# Altium PCB differential receiver.PcbDoc
Units mil, origin at the board's own origin, x right, y up, seen from the top; angles counter-clockwise.
Board outline 2283.46 x 1889.76 mil, 4 copper layers (Top Layer, Layer 1, Layer 2, Bottom Layer), stack 62.417 mil thick; 38 components, 25 nets, 120 pads, 76 vias.
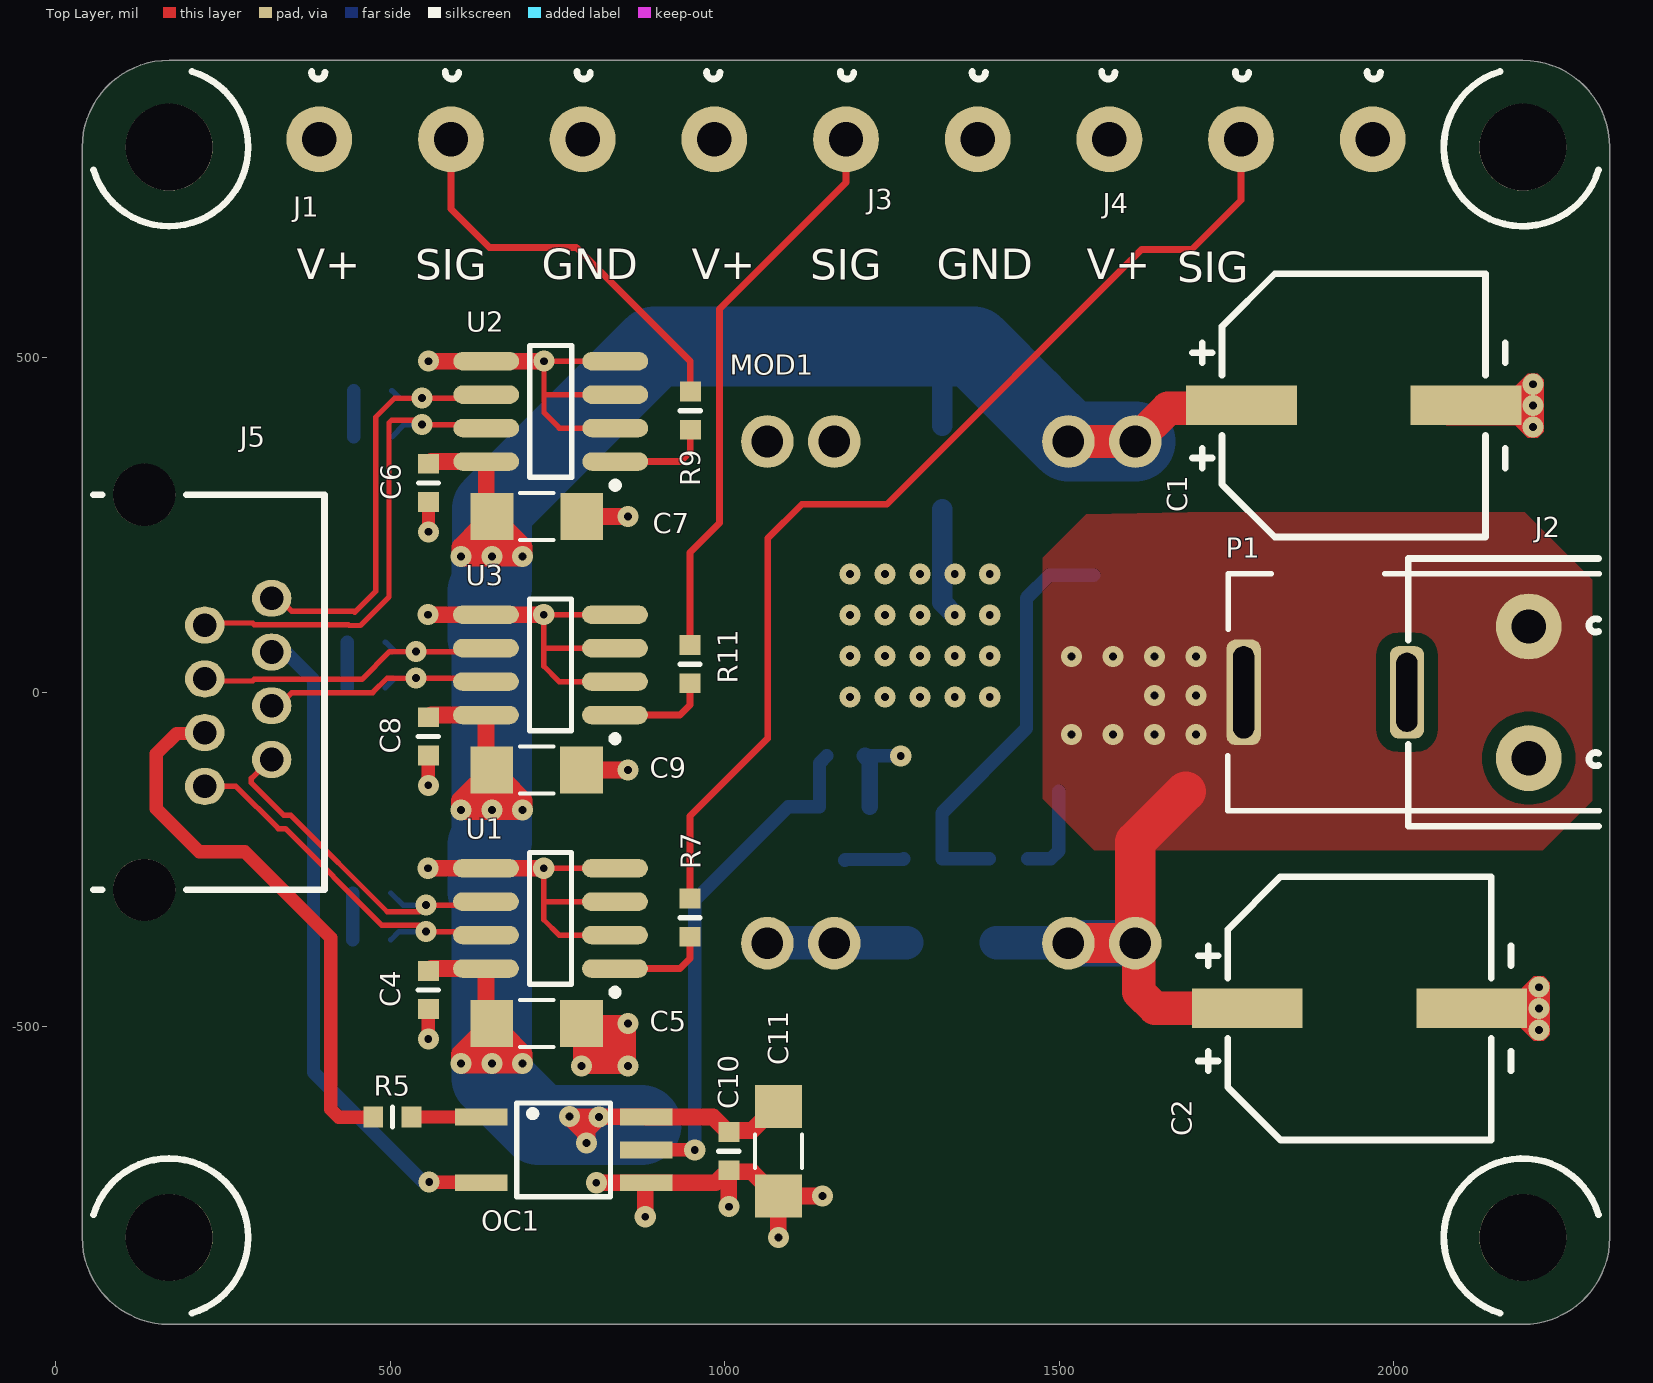
[diagram p0: Top Layer view]
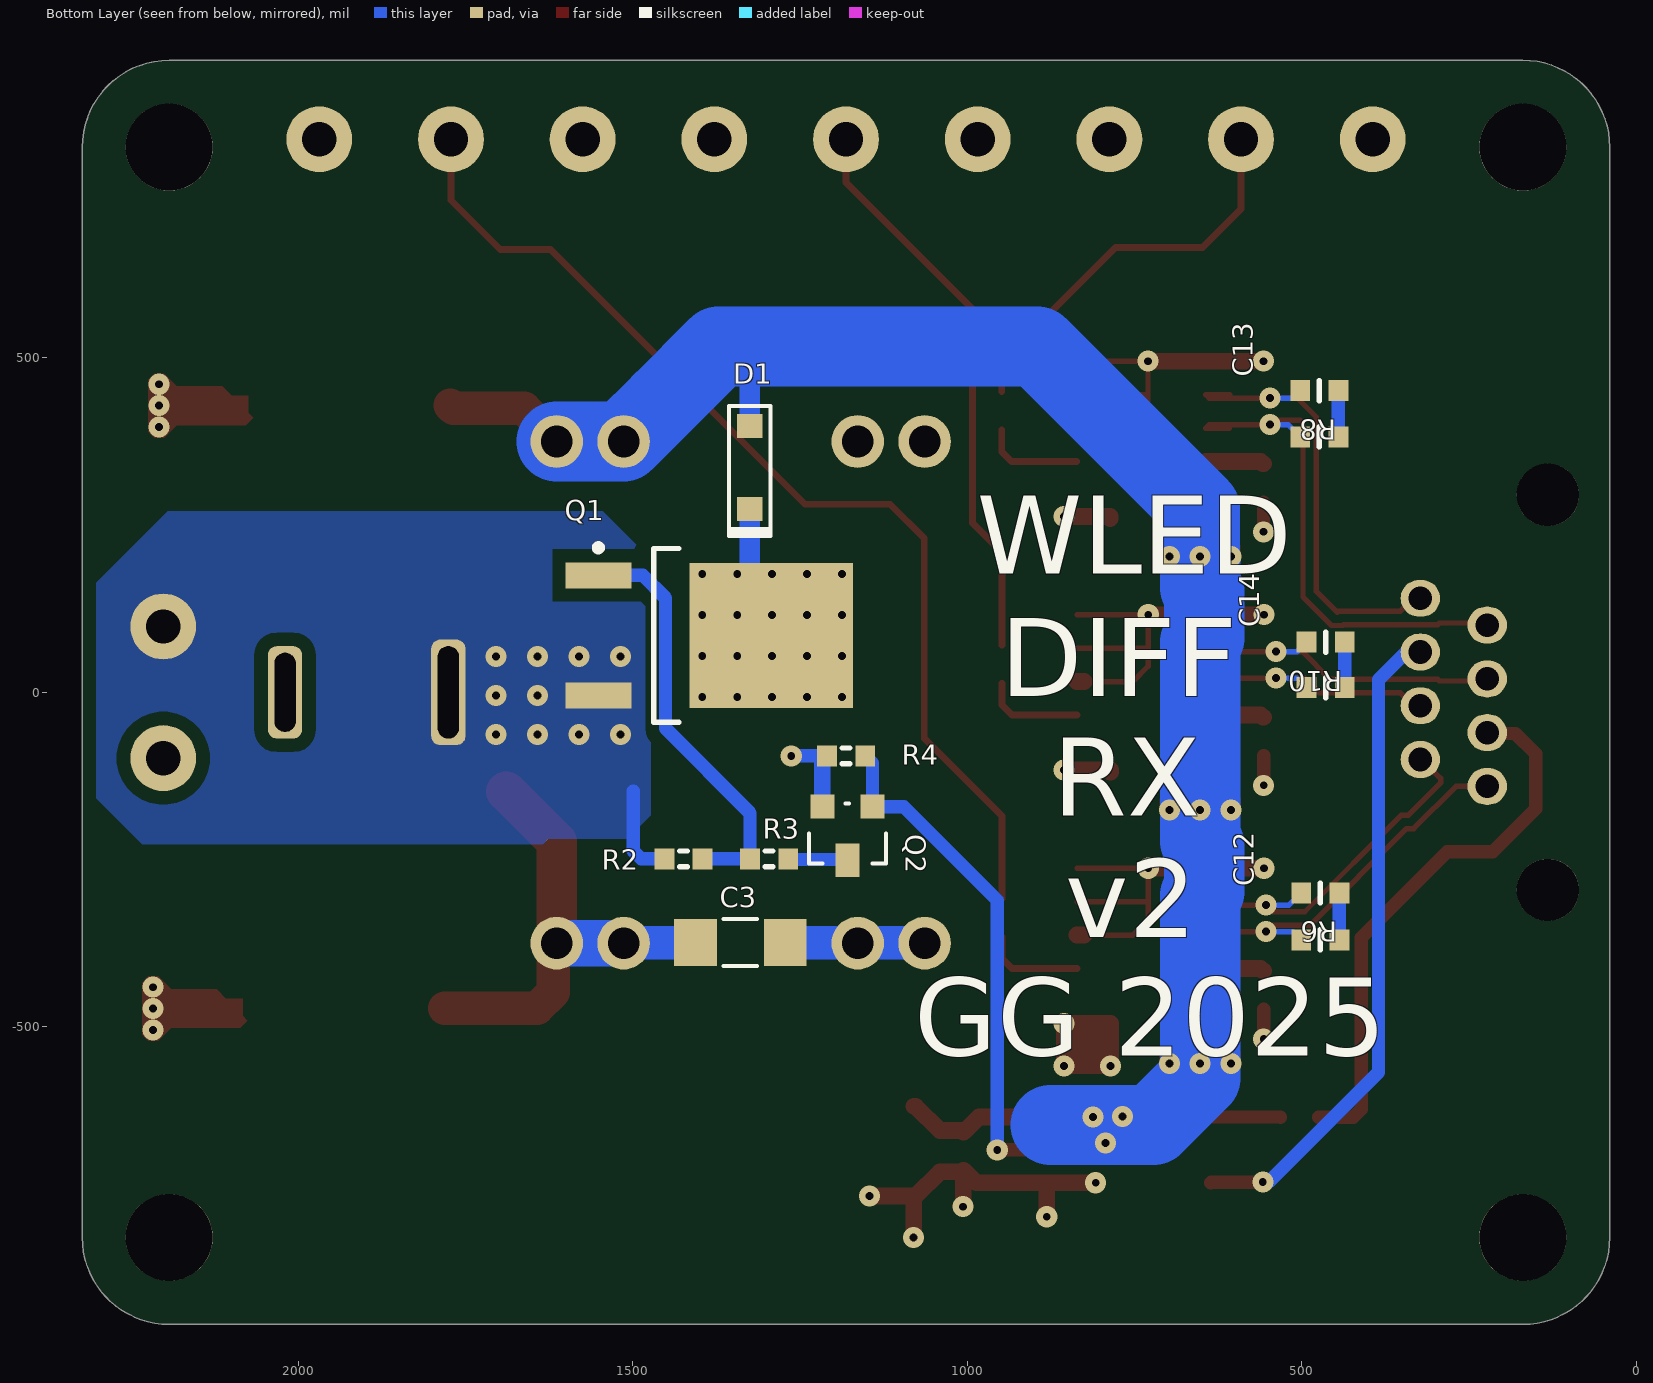
[diagram p1: Bottom Layer view, seen from below]
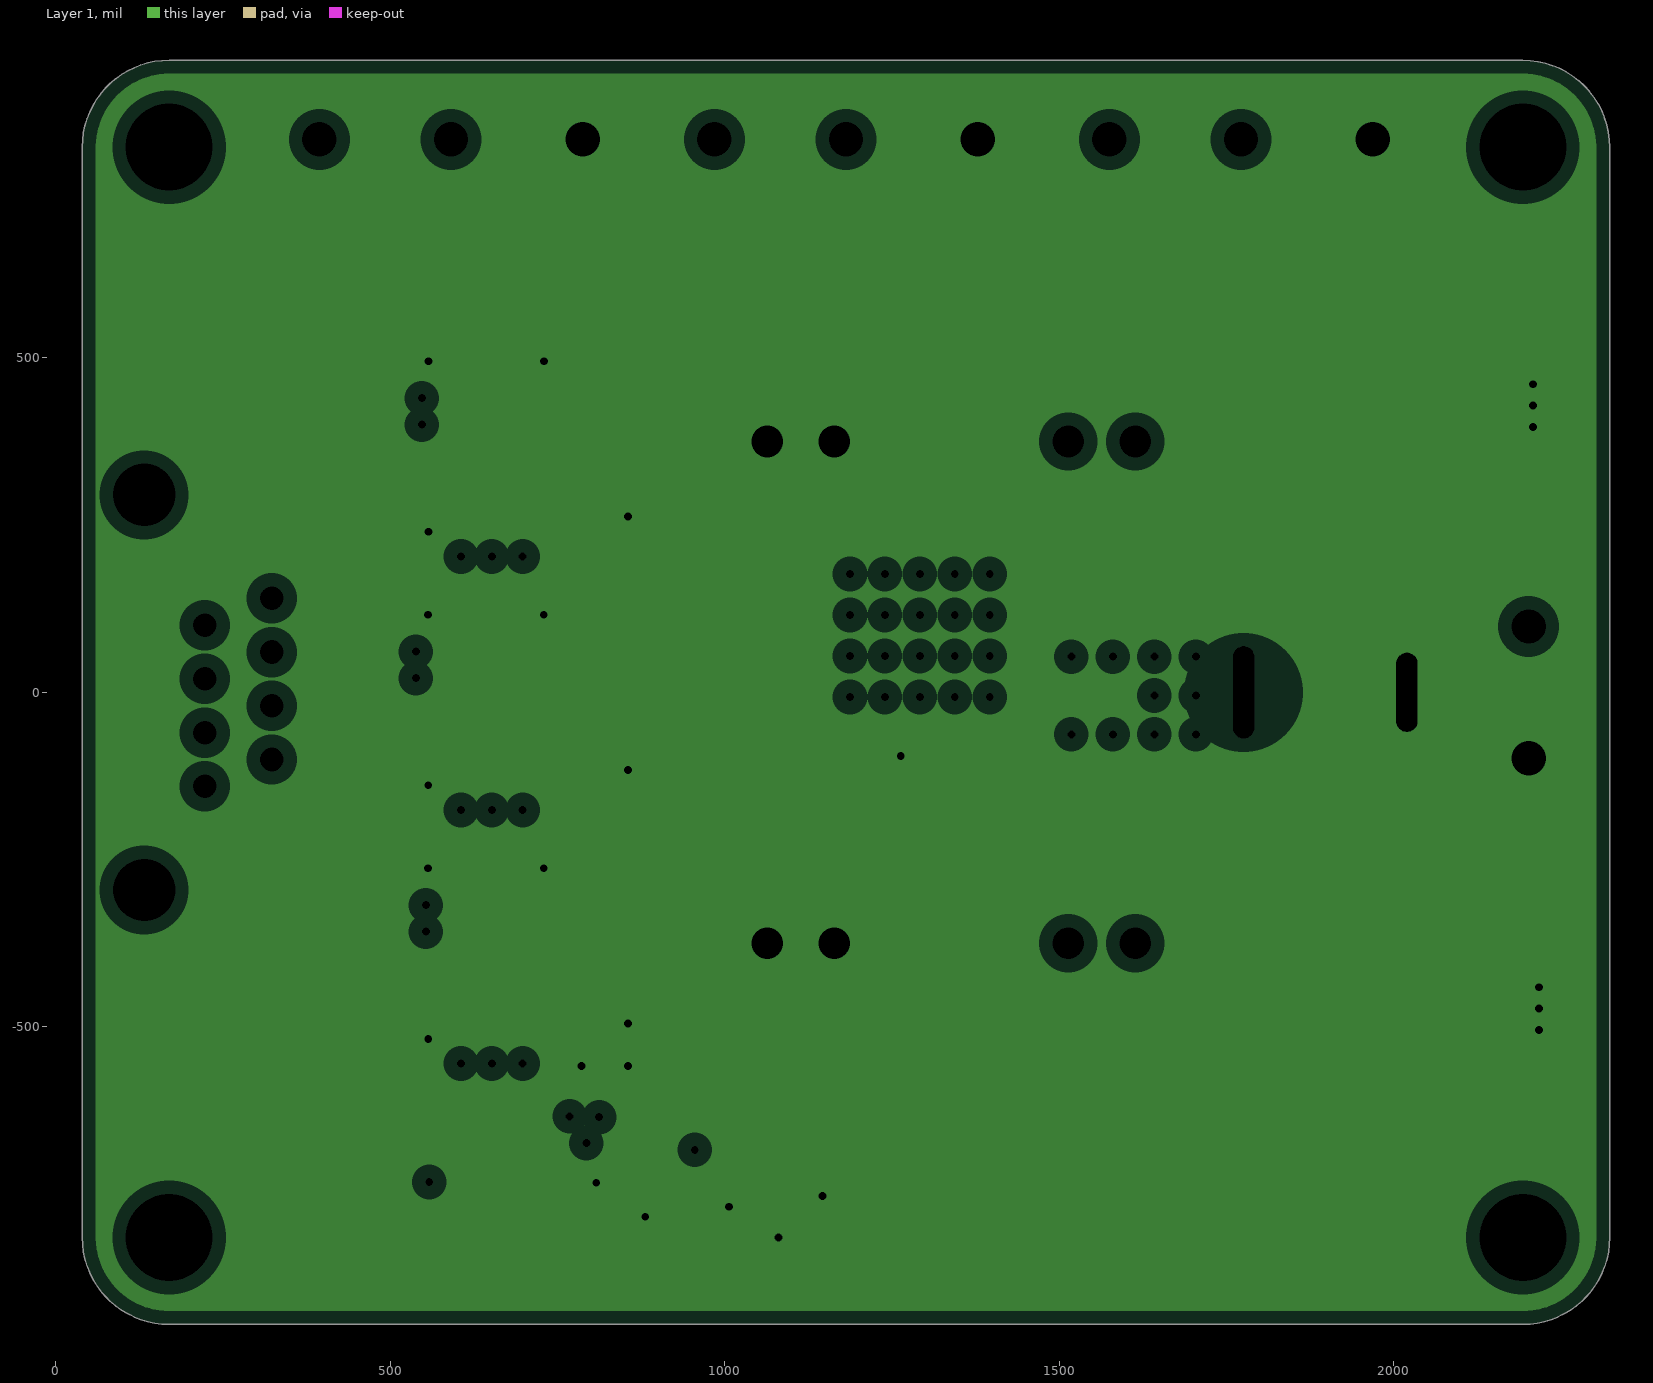
[diagram p2: Layer 1, clearances drawn from the general rule]
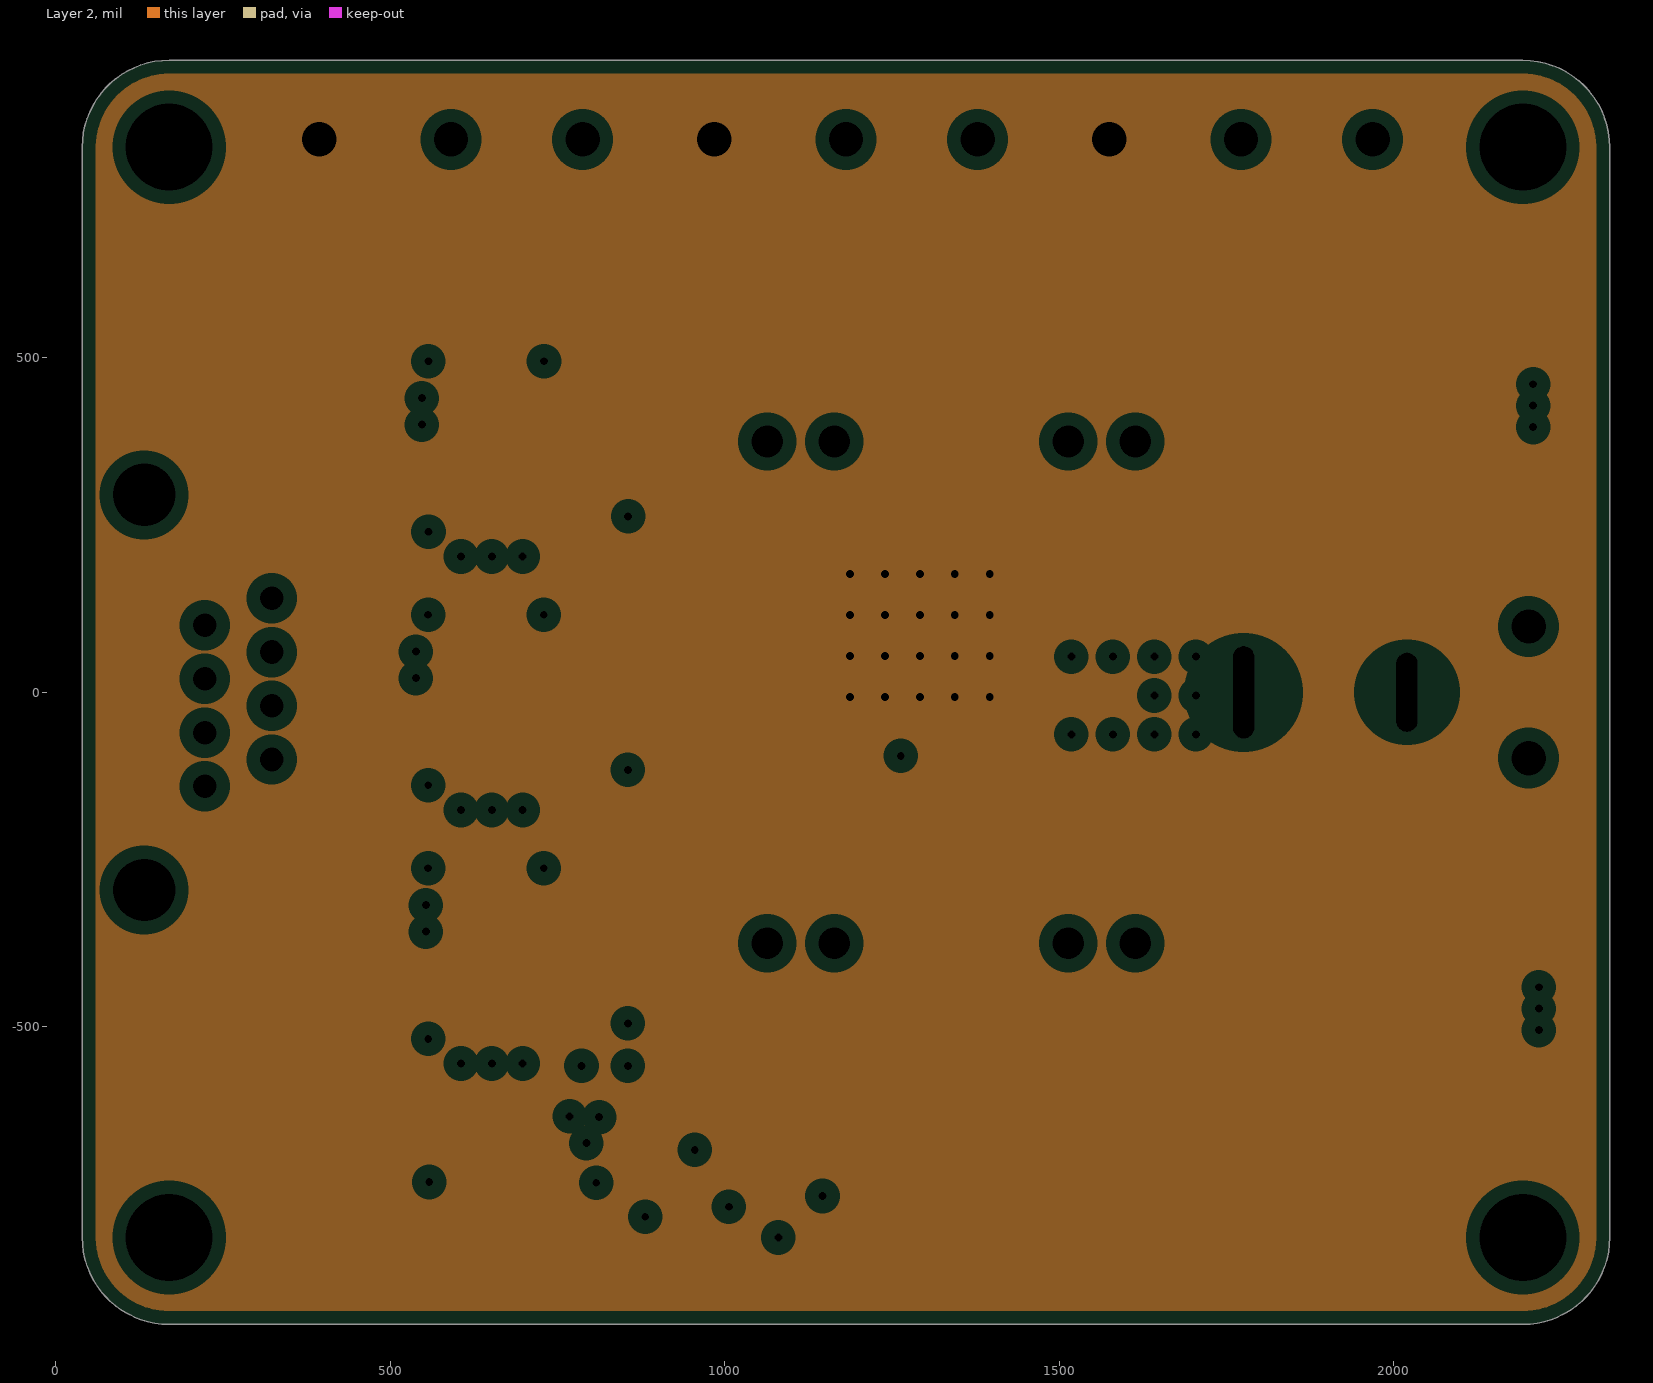
[diagram p3: Layer 2, clearances drawn from the general rule]
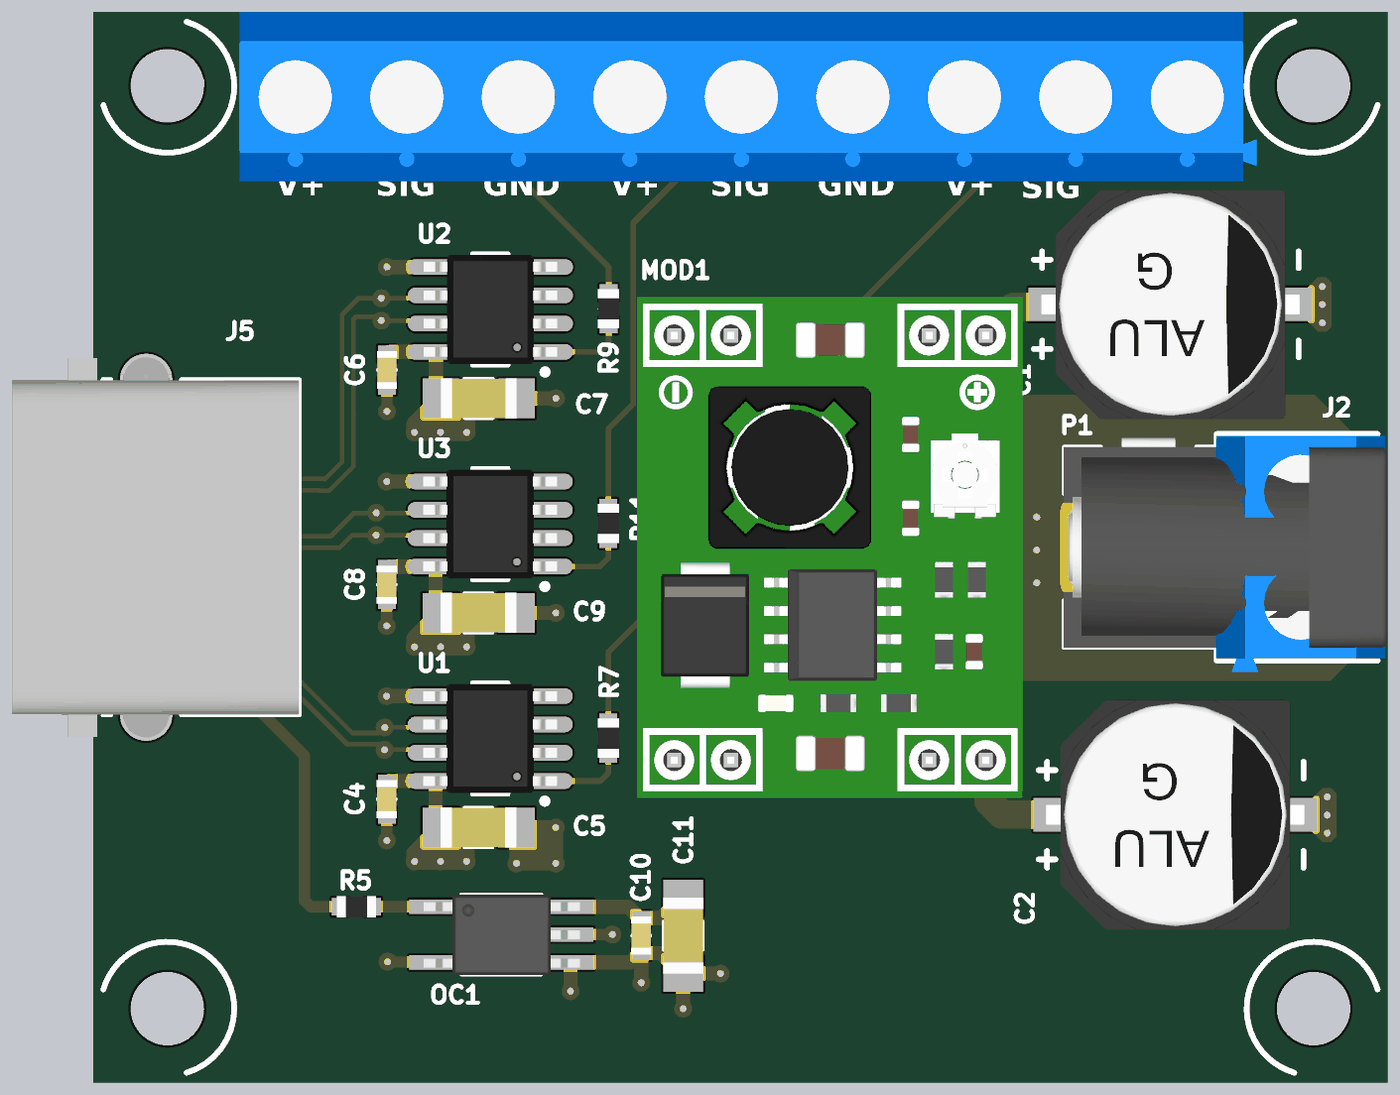
[diagram p4: 3D render of the assembled board from above, using the file's embedded part models]
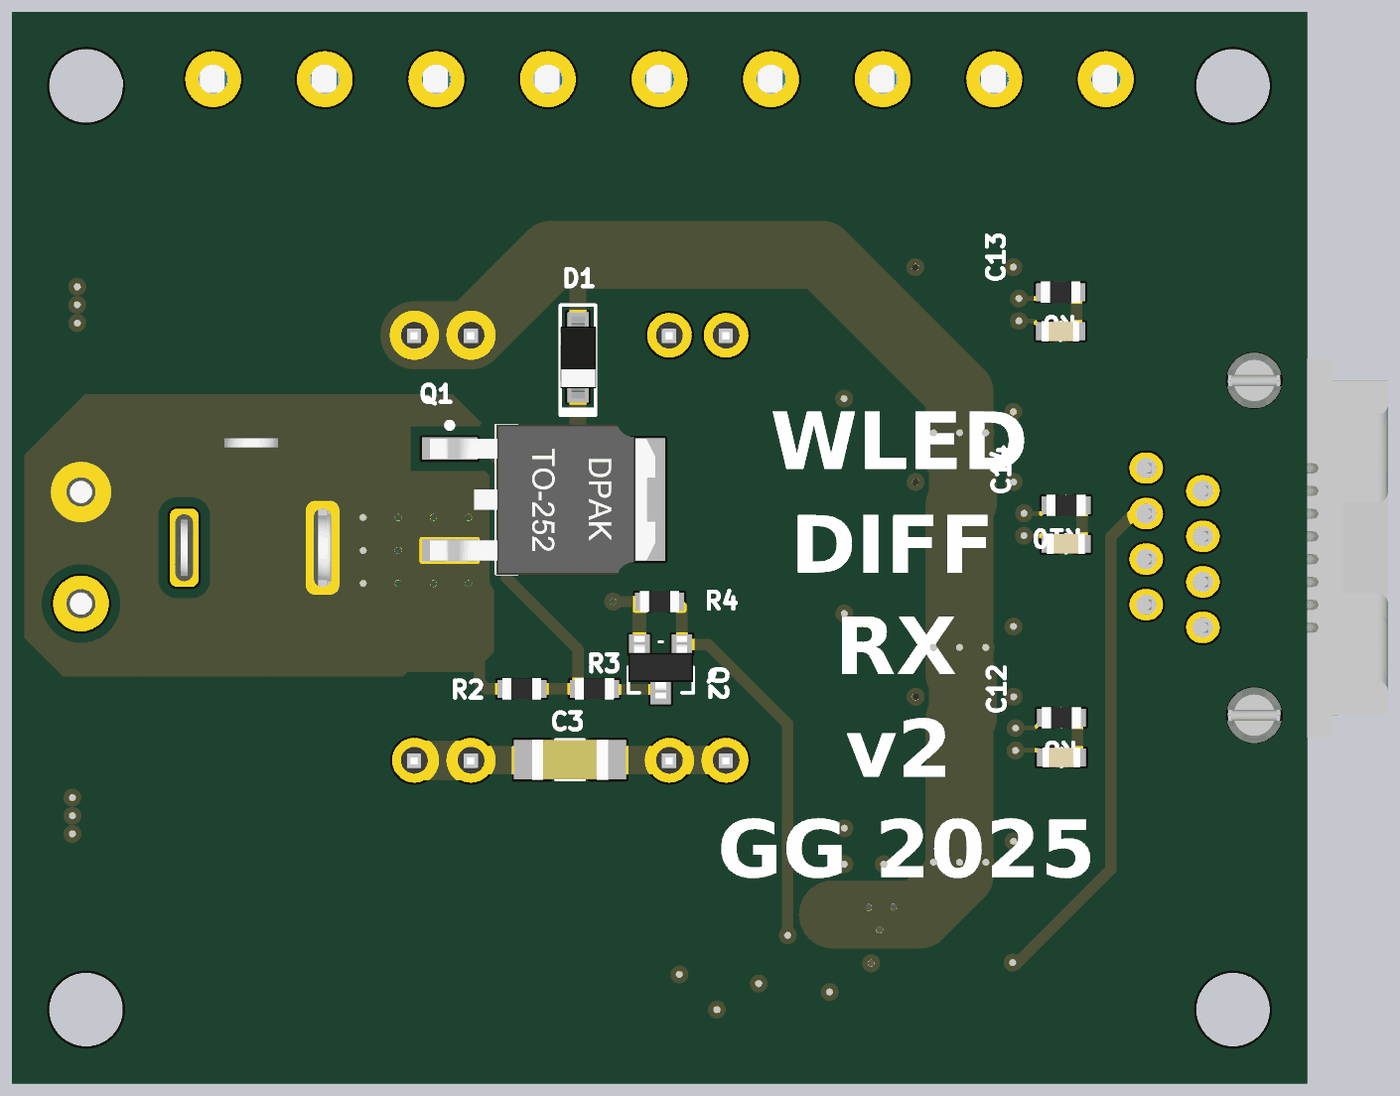
[diagram p5: 3D render of the assembled board from below, using the file's embedded part models]

## Layer stack, top to bottom
Top Solder: solder mask 0.4, Solder Resist, Dk 3.5
Top Layer: signal copper 1.378
Dielectric 2: prepreg 8.2677, PP-006, Dk 4.1
Layer 1: plane copper 0.5984, net GND
Dielectric 1: dielectric 41.9291, FR-4, Dk 4.8
Layer 2: plane copper 0.5984, net VLED
Dielectric 3: prepreg 8.2677, PP-006, Dk 4.1
Bottom Layer: signal copper 1.378
Bottom Solder: solder mask 0.4, Solder Resist, Dk 3.5

## Board outline
39.37,-814.96 39.37,814.96 cw(c169.29,814.96) 169.29,944.88 2192.91,944.88 cw(c2192.91,814.96) 2322.83,814.96 2322.83,-814.96 cw(c2192.91,-814.96) 2192.91,-944.88 169.29,-944.88 cw(c169.29,-814.96)

## Design rules (kind name [scope] priority, off if disabled: settings)
BoardOutlineClearance [All] p1: gap=11.81 ignorepadtopadclearanceinfootprint=FALSE
Clearance Clearance_polygon [InPolygon] p1: gap=20 ignorepadtopadclearanceinfootprint=FALSE
Clearance [All] p2: gap=8 ignorepadtopadclearanceinfootprint=TRUE
ComponentClearance ComponentClearance_1 [InComponent('R6') vs InComponent('R8')] p1: gap=-39.37 collisioncheckmode=3 verticalgap=-39.37 showdistances=FALSE
ComponentClearance ComponentClearance_3 [HasFootprint('J_ARK3') vs HasFootprint('J_ARK3')] p2: gap=-39.37 collisioncheckmode=3 verticalgap=-39.37 showdistances=FALSE
ComponentClearance ComponentClearance_2 [HasFootprint('J_ARK2') vs HasFootprint('P_KLDX-0202-A')] p3: gap=-39.37 collisioncheckmode=3 verticalgap=-39.37 showdistances=FALSE
ComponentClearance [All] p4: gap=10 collisioncheckmode=3 verticalgap=10 showdistances=FALSE
DiffPairsRouting [All] p1: maxlimit=12 minlimit=12 mostfreqgap=12 toplayer_minwidth=8 toplayer_maxwidth=8 toplayer_prefwidth=8 bottomlayer_minwidth=8 bottomlayer_maxwidth=8 bottomlayer_prefwidth=8 impedanceprofiledriven=TRUE impedanceprofileid={ECD16B01-29DE-49CF-9F52-DB93BFE337B0} impedanceprofilevalue=120.000000 maxuncoupledlength=500
HoleSize [All] p1: absolutevalues=TRUE maxlimit=157.48 minlimit=11.81 maxpercent=80.000 minpercent=20.000
MinimumAnnularRing [All] p1: minimumring=7
MinimumSolderMaskSliver [All] p1: minsoldermaskwidth=5
PlaneClearance [All] p1: clearance=20
PlaneConnect [All] p1: planeconnectstyle=Direct reliefexpansion=20 reliefentries=4 reliefconductorwidth=10 reliefairgap=10
PolygonConnect VIA [IsVia] p1: connectstyle=Direct reliefconductorwidth=10 reliefentries=4 polygonreliefangle="90 Angle" airgapwidth=10
PolygonConnect [All] p2: connectstyle=Direct reliefconductorwidth=30 reliefentries=4 polygonreliefangle="90 Angle" airgapwidth=15
RoomDefinition P3 [InComponentClass('P3')] p1: confinementstyle=ConfineIn formatcopy=TRUE lockcomponents=FALSE outline 394,-174 976,-174 976,205 394,205
RoomDefinition P1 [InComponentClass('P1')] p2: confinementstyle=ConfineIn formatcopy=TRUE lockcomponents=FALSE outline 411,-553 976,-553 976,-174 411,-174
RoutingVias [All] p1: holewidth=11.81 width=31.5 viastyle="Through Hole" minholewidth=11.81 minwidth=31.5 maxholewidth=11.81 maxwidth=31.5
SilkToSilkClearance [All] p1: silktosilkclearance=1
SilkToSolderMaskClearance [IsPad] p1: minsilkscreentomaskgap=1 clearancetoexposedcopper=TRUE
SolderMaskExpansion [All] p1: expansion=4 istentingtop=FALSE
SupplyNets "Schematic Supply Nets_3" [InNet('RJ_GND')] p1: voltage=0.000
SupplyNets "Schematic Supply Nets_1" [InNet('VLED')] p2: voltage=0.000
SupplyNets "Schematic Supply Nets_5" [InNet('VIN')] p3: voltage=0.000
SupplyNets "Schematic Supply Nets_2" [InNet('GND')] p4: voltage=0.000
SupplyNets "Schematic Supply Nets" [InNet('+5V')] p5: voltage=0.000
Width [All] p1: maxlimit=150 minlimit=7 preferedwidth=10 minimp=50.000000 maximp=50.000000 favimp=50.000000
22 further rules are at their usual default settings.

## Classes and differential pairs
channel class RS422_RX: P1 P2 P3
component class P3: C8 C9 C14 R10 R11 U3
component class P2: C6 C7 C13 R8 R9 U2
component class P1: C4 C5 C12 R6 R7 U1
component class "differential receiver": C1 C2 C3 C10 C11 D1 J1 J2 J3 J4 J5 MOD1 OC1 P1 Q1 Q2 R2 R3 R4 R5
differential pair P3: +P3_P -P3_N
differential pair P2: +P2_P -P2_N
differential pair P1: +P1_P -P1_N

## Components (designator, comment, footprint, x,y, rotation, side; value= is the part's Value field where it differs from the comment)
C1 "Electrolytic Capacitor" CE_D_10x10_SMD 1940.2,429 r0 top value=100uF (schematic designator C2)
C2 "Electrolytic Capacitor" CE_D_10x10_SMD 1948.82,-472.44 r0 top value=100uF (schematic designator C1)
C3 "Ceramic X7R" C_1206_3216 1339,-374 r180 bottom value=10uF
C4 "Ceramic X7R" C_0603_1608 556.64,-444.98 r270 top value=100nF (schematic designator C3)
C5 "Ceramic X7R" C_1206_3216 718.64,-494.98 r0 top value=10uF (schematic designator C2)
C6 "Ceramic X7R" C_0603_1608 557,313 r270 top value=100nF (schematic designator C3)
C7 "Ceramic X7R" C_1206_3216 719,263 r0 top value=10uF (schematic designator C2)
C8 "Ceramic X7R" C_0603_1608 556.64,-65.98 r270 top value=100nF (schematic designator C3)
C9 "Ceramic X7R" C_1206_3216 718.64,-115.98 r0 top value=10uF (schematic designator C2)
C10 "Ceramic X7R" C_0603_1608 1005.98,-685.98 r270 top value=100nF (schematic designator C4)
C11 "Ceramic X7R" C_1206_3216 1080,-686 r270 top value=10uF (schematic designator C5)
C12 "Ceramic X7R" C_0603_1608 472,-370 r0 bottom value=100nF (schematic designator C6)
C13 "Ceramic X7R" C_0603_1608 473.54,382 r0 bottom value=100nF (schematic designator C6)
C14 "Ceramic X7R" C_0603_1608 464,7 r0 bottom value=100nF (schematic designator C6)
D1 "1N4148W" SOD123 1325,336 r90 bottom value=1N4148W-E3-08
J1 "ARK3" J_ARK3 590.55,826.77 r0 top locked value=DG301-5.0-03P-12-18A(H)
J2 "ARK2" J_ARK2 2201.78,0 r270 top locked value=DG301-5.0-02P-12-18A(H) (schematic designator J9)
J3 "ARK3" J_ARK3 1181.1,826.77 r0 top locked value=DG301-5.0-03P-12-18A(H) (schematic designator J2)
J4 "ARK3" J_ARK3 1771.65,826.77 r0 top locked value=DG301-5.0-03P-12-18A(H) (schematic designator J3)
J5 "Modular Connector, Modular Jack, 1 x 1 (Port), 8P8C, Cat3" J_RJ45_MJ3225-88-0 177.17,0 r270 top value=MJ3225-88-0 (schematic designator J4)
MOD1 "Low cost, Aliexpress-ready DC-DC buck converter using MP1584" MOD_BUCK_MP1584 1338.58,0 r90 top locked value=-
OC1 "Optocoupler DC-IN 1-CH Transistor With Base DC-OUT Automotive" SO-5 759,-684 r0 top value=ACPL-M43T-000E
P1 "DC JACK" P_KLDX-0202-A 2019.68,0 r0 top locked value=KLDX-0202-A (schematic designator P2)
Q1 "AOD423" DPAK_TO252-3_SC63_M 1386,85 r180 bottom
Q2 "2N7002K-7" SOT23_TO236_SC59 1179,-211 r0 bottom
R2 "Resistor" R_0603_1608 1424,-249 r0 bottom value=10k (schematic designator R3)
R3 "Resistor" R_0603_1608 1296,-249 r180 bottom value=10k (schematic designator R4)
R4 "Resistor" R_0603_1608 1181,-95 r0 bottom value=10k (schematic designator R5)
R5 "Resistor" R_0603_1608 503,-635 r0 top value=1.6k (schematic designator R7)
R6 "Resistor" R_0603_1608 472,-300 r0 bottom value=100R (schematic designator R1)
R7 "Resistor" R_0603_1608 948,-336.95 r270 top value=100R (schematic designator R2)
R8 "Resistor" R_0603_1608 473.54,451 r0 bottom value=100R (schematic designator R1)
R9 "Resistor" R_0603_1608 948.36,421.02 r270 top value=100R (schematic designator R2)
R10 "Resistor" R_0603_1608 464,75 r0 bottom value=100R (schematic designator R1)
R11 "Resistor" R_0603_1608 948,42.05 r270 top value=100R (schematic designator R2)
U1 "Transceiver" SOP8_SO8_SOIC8_4X5X18 739.28,-337.95 r180 top value=SN65HVD1782D
U2 "Transceiver" SOP8_SO8_SOIC8_4X5X18 739.64,420.02 r180 top value=SN65HVD1782D (schematic designator U1)
U3 "Transceiver" SOP8_SO8_SOIC8_4X5X18 739.28,41.05 r180 top value=SN65HVD1782D (schematic designator U1)

## Footprints (in the part's own frame and the unit in brackets; to place one, negate y for a bottom-side part, rotate by r counter-clockwise, add the part's x,y. Pads: shape width x height; smd on the part's side, far side on the other; paste and mask are expansions set on the pad)
C_0603_1608 [mm]
  rect 0.75x0.8 smd: 1(-0.725,0) 2(0.725,0)
  silkscreen extent 0,-0.38 0,0.38, body extent -0.85,-0.45 0.85,0.45, height 0.89
C_1206_3216 [mil]
  rect 64x70 smd: 1(-67,0) 2(67,0)
  silkscreen extent -25,-35 25,35, body extent -67,-35 67,35, height 39
CE_D_10x10_SMD [mm]
  rect 4.2x1.5 smd: 1(-4.262,0) 2(4.262,0)
  silkscreen extent -6.13,-5 5.75,5, body extent -5.8,-5.15 5.8,5.15, height 10.21
DPAK_TO252-3_SC63_M [mm] "D-PAK, 3-Pads+1-heatsink, Body 6,20x6,60mm (max), IPC Medium Density"
  rect 2.5x1 smd: 1(-4.2,2.28) 3(-4.2,-2.28)
  rect 6.2x5.5 smd: 2(2.362,0)
  silkscreen extent -4.33,-3.3 -1.15,3.45, body extent -5.08,-3.37 5.02,3.37, height 2.37
J_ARK2 [mm]
  round 2.5 hole 1.3: 1(-2.5,0) 2(2.5,0)
  silkscreen extent -5.08,-4.57 5.08,2.65, body extent -5,-4.6 5.6,3, height 10.05
J_ARK3 [mm]
  round 2.5 hole 1.3: 1(-5,0) 2(0,0) 3(5,0)
  silkscreen extent -5.29,2.29 5.29,2.57, body extent -7.46,-4.6 8.14,3, height 10.05
J_RJ45_MJ3225-88-0 [mm]
  oval 1.4x1.5 hole 0.9: 1(3.57,1.15) 2(2.55,3.69) 3(1.53,1.15) 4(0.51,3.69) 5(-0.51,1.15) 6(-1.53,3.69) 7(-2.55,1.15) 8(-3.57,3.69)
  round 2.36 hole 2.36 unplated: DNC(-7.5,-1.15) DNC(7.5,-1.15)
  silkscreen extent -7.5,-3.07 7.5,5.7, body extent -8.75,-7.15 8.75,5.7, height 14.5
MOD_BUCK_MP1584 [mm] "Normal"
  round 2 hole 1.2: 1(-9.525,-6.985) 2(-9.525,-4.445) 3(-9.525,4.445) 4(-9.525,6.985) 5(9.525,-6.985) 6(9.525,-4.445) 7(9.525,4.445) 8(9.525,6.985)
  body extent -11.25,-8.65 11.25,8.65, height 6.69
P_KLDX-0202-A [mm] "Connector; DC JACK"
  rrect50% 1.3x4 hole 0.8 slot 3.5 at 90 deg: 1(-6.2,0)
  rrect50% 1.3x3.5 hole 0.8 slot 3 at 90 deg: 2(0,0)
  silkscreen extent -6.8,-4.5 7.3,4.5, body extent -6.8,-4.5 7.7,4.9, height 10.8
R_0603_1608 [mm]
  rect 0.75x0.8 smd: 1(-0.725,0) 2(0.725,0)
  silkscreen extent -0.15,-0.3 0.15,0.3, body extent -0.87,-0.47 0.88,0.48, height 0.54
SO-5 [mm]
  rect 2x0.64 smd: 1(-3.135,1.25) 3(-3.135,-1.25) 4(3.135,-1.25) 5(3.135,0) 6(3.135,1.25)
  silkscreen extent -1.78,-1.78 1.78,1.78, body extent -3.48,-1.82 3.52,1.78, height 2.45
SOD123 [mm]
  rect 0.9x0.95 smd: 1(-1.575,0) 2(1.575,0)
  silkscreen extent -2.59,-0.79 2.34,0.79, body extent -1.86,-0.81 1.84,0.79, height 1.27
SOP8_SO8_SOIC8_4X5X18 [mm]
  oval 2.5x0.7 smd: 1(-2.45,1.905) 2(-2.45,0.635) 3(-2.45,-0.635) 4(-2.45,-1.905) 5(2.45,-1.905) 6(2.45,-0.635) 7(2.45,0.635) 8(2.45,1.905)
  silkscreen extent -2.58,-2.5 0.8,2.93, body extent -3,-2.45 3,2.45, height 1.7
SOT23_TO236_SC59 [mil]
  rect 36x36 smd: 1(-37.5,-40) 2(37.5,-40)
  rect 36x50 smd: 3(0,40)
  silkscreen extent -57,-45 58,45, body extent -57,-55 57,55, height 51

## Part data
C1 C2: library part CE_100uF_50V_AL2O3_10x10_20, "Polarized Capacitor", Dielectric=AL2O3, Manufacturer=Nichicon, Manufacturer Part Number=UUX1H101MNL1GS, Tolerance (%)=20, Voltage=50V, HelpURL=https://datasheet.octopart.com/UUX1H101MNL1GS-Nichicon-datasheet-62047998.pdf, Part Number=CE_100uF_50V_AL2O3_10x10_20, SCH_Footprint=10x10, Supplier 1=TME, Supplier 2="RS Components", Supplier 3=Farnell, Supplier 4=Mouser, Supplier 5=Digi-Key, Supplier 6=LCSC, Supplier Part Number 1=UUX1H101MNL1GS, Supplier Part Number 2=7393107, Supplier Part Number 3=2841943, Supplier Part Number 4=647-UUX1H101MNL1GS, Supplier Part Number 5=493-6269-1-ND
C3 C5 C7 C9 C11: library part C_10uF_25V_X7R_1206_10, "Capacitor", Dielectric=X7R, Manufacturer=Samsung, Manufacturer Part Number=CL31B106KAHNNNE, Tolerance (%)=10, Voltage=25V, HelpURL=http://www.tme.eu/pl/Document/4a42202b32dab16128fe107dd69598cc/samsung-chip-cap.pdf, Part Number=C_10uF_25V_X7R_1206_10, SCH_Footprint=1206, Supplier 1=TME, Supplier 2="RS Components", Supplier 3=Farnell, Supplier 4=Mouser, Supplier 5=Digi-Key, Supplier 6=LCSC, Supplier Part Number 1=CL31B106KAHNNNE, Supplier Part Number 2=766-6773, Supplier Part Number 3=3013526, Supplier Part Number 4=187-CL31B106KAHNNNE, Supplier Part Number 5=1276-1804-1-ND
C4 C6 C8 C10 C12 C13 C14: library part C_100nF_50V_X7R_0603_5, "Capacitor", Dielectric=X7R, Manufacturer=Samsung, Manufacturer Part Number=CL10B104JB8NNNC, Tolerance (%)=5, Voltage=50V, HelpURL=http://www.tme.eu/pl/Document/4a42202b32dab16128fe107dd69598cc/samsung-chip-cap.pdf, Part Number=C_100nF_50V_X7R_0603_5, SCH_Footprint=0603, Supplier 1=TME, Supplier 2="RS Components", Supplier 3=Farnell, Supplier 4=Mouser, Supplier 5=Digi-Key, Supplier 6=LCSC, Supplier Part Number 1=CL10B104JB8NNNC, Supplier Part Number 2=7665455, Supplier Part Number 5=1276-1033-1-ND, Supplier Part Number 6=C24452
D1: library part D_1N4148W_0A15_75V_SOD123, Current=0.15A, Manufacturer=Vishay, Manufacturer Part Number=1N4148W-E3-08, Voltage=75, HelpURL=https://datasheet.octopart.com/1N4148W-E3-08-Vishay-datasheet-17291302.pdf, Part Number=D_1N4148W_0A15_75V_SOD123, SCH_Footprint=SOD123, Supplier 1=TME, Supplier 2="RS Components", Supplier 3=Farnell, Supplier 4=Mouser, Supplier 5=Digi-Key, Supplier 6=LCSC, Supplier Part Number 1=1N4148W-E3-08, Supplier Part Number 2=7003671, Supplier Part Number 3=2433353, Supplier Part Number 4=78-1N4148W-E3-08, Supplier Part Number 5=1N4148W-E3-08CT-ND
J1 J3 J4: library part J_TB-5.0-P-3P, "ARK Screw terminal, 3-Pin", Manufacturer="DEGSON ELECTRONICS", Manufacturer Part Number=DG301-5.0-03P-12-18A(H), Supplier Part Number 1=DG301-5.0-3/6B, HelpURL=https://datasheet.octopart.com/DG301-5.0-03P-12-18A%28H%29-Degson-datasheet-17801202.pdf, Part Number=J_TB-5.0-P-3P, SCH_Footprint=ARK3, Supplier 1=TME, Supplier 2="RS Components", Supplier 3=Farnell, Supplier 4=Mouser, Supplier 5=Digi-Key, Supplier 6=LCSC
J2: library part J_TB-5.0-P-2P, "ARK Screw terminal, 2-Pin", Manufacturer="DEGSON ELECTRONICS", Manufacturer Part Number=DG301-5.0-02P-12-18A(H), Supplier Part Number 1=DG301-5.0-2/6B, HelpURL=https://datasheet.octopart.com/DG301-5.0-03P-12-18A%28H%29-Degson-datasheet-17801202.pdf, Part Number=J_TB-5.0-P-2P, SCH_Footprint=ARK2, Supplier 1=TME, Supplier 2="RS Components", Supplier 3=Farnell, Supplier 4=Mouser, Supplier 5=Digi-Key, Supplier 6=LCSC
J5: library part J_RJ45_MJ3225-88-0, Manufacturer="Global Connector Technology", Manufacturer Part Number=MJ3225-88-0, HelpURL=https://www.farnell.com/cad/3781788.pdf, Part Number=J_RJ45_MJ3225-88-0, SCH_Footprint=J_RJ45, Supplier 1=TME, Supplier 2="RS Components", Supplier 3=Farnell, Supplier 4=Mouser, Supplier 5=Digi-Key, Supplier 6=LCSC, Supplier 7=Newark, Supplier Part Number 3=4071641, Supplier Part Number 7=61AK4308
MOD1: library part MOD_BUCK_MP1584, Manufacturer=-, HelpURL=https://pl.aliexpress.com/item/32341006065.html, Manufacturer Part Number=-, Part Number=MOD_BUCK_MP1584, SCH_Footprint=17.3x22.5mm, Supplier 1=TME, Supplier 2="RS Components", Supplier 3=Farnell, Supplier 4=Mouser, Supplier 5=Digi-Key, Supplier 6=LCSC, Supplier 7=-, Supplier Part Number 7=-
OC1: library part OC_ACPL-M43T-000E, Manufacturer=Broadcom, Manufacturer Part Number=ACPL-M43T-000E, HelpURL=https://datasheet.octopart.com/ACPL-M43T-000E-Broadcom-datasheet-68302489.pdf, Part Number=OC_ACPL-M43T-000E, SCH_Footprint=SO-5, Supplier 1=TME, Supplier 2="RS Components", Supplier 3=Farnell, Supplier 4=Mouser, Supplier 5=Digi-Key, Supplier 6=LCSC, Supplier Part Number 3=1244509, Supplier Part Number 4=630-ACPL-M43T-000E, Supplier Part Number 5=516-2256-5-ND
P1: library part P_KLDX-0202-A, "Typical 3-pin jack power connector with switch", Manufacturer=Kycon, Manufacturer Part Number=KLDX-0202-A, HelpURL=http://www.kycon.com/2013Catalogpage/DC%20Power/KLDX_0202.pdf, Part Number=P_KLDX-0202-A, SCH_Footprint=THT, Supplier 1=TME, Supplier 2="RS Components", Supplier 3=Farnell, Supplier 4=Mouser, Supplier 5=Digi-Key, Supplier 6=LCSC, Supplier Part Number 3=2839850, Supplier Part Number 4=806-KLDX-0202-A, Supplier Part Number 5=2092-KLDX-0202-A-ND
Q1: library part QP_AOD423, Current=67A, Manufacturer="Alpha&Omega Semiconductor", Voltage=30V, HelpURL=https://www.aosmd.com/sites/default/files/res/datasheets/AOI423.pdf, Manufacturer Part Number=AOD423, Part Number=QP_AOD423, SCH_Footprint=TO252, Supplier 1=TME, Supplier 2="RS Components", Supplier 3=Farnell, Supplier 4=Mouser, Supplier 5=Digi-Key, Supplier 6=LCSC, Supplier Part Number 1=AOD423, Type=P-MOS
Q2: library part QN_2N7002K-7, Current=0A8, Manufacturer="Diodes Inc", Voltage=60V, HelpURL=http://datasheet.octopart.com/2N7002K-7-Diodes-Inc.-datasheet-12515815.pdf, Manufacturer Part Number=2N7002K-7, Part Number=QN_2N7002K-7, SCH_Footprint=SOT23, Supplier 1=TME, Supplier 2="RS Components", Supplier 3=Farnell, Supplier 4=Mouser, Supplier 5=Digi-Key, Supplier 6=LCSC, Supplier Part Number 2=7703383, Supplier Part Number 3=1713825, Supplier Part Number 4=621-2N7002K-7, Supplier Part Number 5=2N7002K-7DICT-ND, Type=N-MOS
R2 R3 R4: library part R_10k_0603_1, Manufacturer=Vishay, Manufacturer Part Number=CRCW060310K0FKTA, Power=100mW, Supplier Part Number 1=CRCW060310K0FKTABC, Tolerance=1%, Voltage=75V, HelpURL=https://octopart.com/datasheet/crcw060310k0fkta-vishay-39447548, Part Number=R_10k_0603_1, SCH_Footprint=0603, Supplier 1=TME, Supplier 2="RS Components", Supplier 3=Farnell, Supplier 4=Mouser, Supplier 5=Digi-Key, Supplier 6=LCSC, Supplier Part Number 3=1652827, Supplier Part Number 4=71-CRCW0603-10K, Supplier Part Number 5=541-2980-1-ND
R5: library part R_1.6k_0603_1_AECQ0, Manufacturer=Panasonic, Manufacturer Part Number=ERJ-3EKF1601V, Power=100mW, Supplier Part Number 1=ERJ3EKF1601V, Tolerance=1%, Voltage=75V, HelpURL=https://industrial.panasonic.com/cdbs/www-data/pdf/RDA0000/AOA0000C304.pdf, Part Number=R_1.6k_0603_1_AECQ0, SCH_Footprint=0603, Supplier 1=TME, Supplier 2="RS Components", Supplier 3=Farnell, Supplier 4=Mouser, Supplier 5=Digi-Key, Supplier 6=LCSC, Supplier Part Number 3=2303159, Supplier Part Number 4=667-ERJ-3EKF1601V, Supplier Part Number 5=P1.60KHCT-ND
R6 R8 R10: library part R_100R_0603_1_AECQ0, Manufacturer=Panasonic, Manufacturer Part Number=ERJ-3EKF1000V, Power=100mW, Supplier Part Number 1=ERJ3EKF1000V, Tolerance=1%, Voltage=75V, AEC-Q=0, HelpURL=https://industrial.panasonic.com/cdbs/www-data/pdf/RDA0000/AOA0000C304.pdf, Part Number=R_100R_0603_1_AECQ0, SCH_Footprint=0603, Supplier 1=TME, Supplier 2="RS Components", Supplier 3=Farnell, Supplier 4=Mouser, Supplier 5=Digi-Key, Supplier 6=LCSC, Supplier Part Number 3=2303059, Supplier Part Number 4=667-ERJ-3EKF1000V, Supplier Part Number 5=P100HCT-ND, Supplier Part Number 6=C193336
R7 R9 R11: library part R_100R_0603_1, Manufacturer=Yageo, Manufacturer Part Number=RC0603FR-07100RL, Power=100mW, Supplier Part Number 1=RC0603FR-07100R, Tolerance=1%, Voltage=50V, HelpURL=http://www.tme.eu/en/Document/d2a72e545e5c8eb7bf2a04fa97535928/rc0603yageo.pdf, Part Number=R_100R_0603_1, SCH_Footprint=0603, Supplier 1=TME, Supplier 2="RS Components", Supplier 3=Farnell, Supplier 4=Mouser, Supplier 5=Digi-Key, Supplier 6=LCSC, Supplier Part Number 3=2131804, Supplier Part Number 4=603-RC0603FR-07100RL, Supplier Part Number 5=311-100HRCT-ND
U1 U2 U3: library part U_SN65HVD1782DR, "Fault-Protected  RS-485  Transceivers  With 3.3-V to 5-V Operation", Manufacturer="Texas Instruments", Manufacturer Part Number=SN65HVD1782D, HelpURL=http://www.ti.com/lit/ds/slls877h/slls877h.pdf, Part Number=U_SN65HVD1782DR, SCH_Footprint=SO-8, Supplier 1=TME, Supplier 2="RS Components", Supplier 3=Farnell, Supplier 4=Mouser, Supplier 5=Digi-Key, Supplier 6=LCSC, Supplier Part Number 2=7093179P, Supplier Part Number 3=1755056, Supplier Part Number 4=595-SN65HVD1782D, Supplier Part Number 5=296-33574-5-ND

## Free pads (board coordinates)
  round 129.92 hole 129.92 unplated: ""(169.29,-814.96) ""(169.29,814.96) ""(2192.91,-814.96) ""(2192.91,814.96)

## Via types
v1: diameter 31.5, hole 11.81, Top Layer to Bottom Layer, tented both sides, 76 vias

## Nets (pads, with @x,y where several pads share a name; then routed paths per layer and width w, separated by ;. In a path a pad name is that pad's centre, name@x,y a point inside that pad or via, vN(x,y) a via of type N, cw(c..) or ccw(c..) an arc to the next point about the centre after c; other vN are vias at no path point)
+5V: C1.1 C4.1 C5.1 C6.1 C7.1 C8.1 C9.1 C10.1 C11.1 D1.2 MOD1.5 MOD1.6 OC1.6 U1.8 U2.8 U3.8 | length 4610.3
  Top Layer w25: C4.1 557.62,-416.43 561.1,-412.95 U1.8 642.78,-413 642.78,-470.91 C5.1@642.73,-470.95 ; C8.1 557.62,-37.43 561.1,-33.95 U3.8 642.78,-34 642.78,-91.91 C9.1@642.73,-91.95 ; C6.1 557.98,341.54 561.46,345.02 U2.8 U2.8 643.14,287.07 C7.1@643.09,287.02 ; v1(812,-635) 812,-636.76 794.24,-654.52 794.24,-672.76 v1(793,-674) 791.76,-672.76 v1@791.76,-659.52 ; C11.1 1077,-619 1040.81,-655.19 1008.26,-655.19 C10.1 1005.02,-657.46 982.35,-634.79 OC1.6 882.33,-634.69 791,-634.69 ; MOD1.6 MOD1.6@1529,375 ; 791,-634.69 768.69,-634.69 v1(768,-634) 768,-635.76 v1@791.76,-659.52 ; 791,-634.69 791.76,-635.45 v1@791.76,-659.52
  Top Layer w30: v1@605.92,203.31 v1(605.64,203.02) 629.02,203.02 ; v1@606.29,203.29 606.29,217.29 635,246 635,209 629.02,203.02 ; C5.1 v1(651.64,-554.98) ; C9.1 v1(651.64,-175.98) ; C7.1 v1@652,203.02 ; v1@697.35,203.31 v1(697.64,203.02) 674.98,203.02 ; v1@697.71,203.29 697.71,217.29 669,246 669,209 674.98,203.02 ; 628.64,-554.98 634.64,-548.98 634.64,-511.98 605.92,-540.69 605.92,-554.69 v1(605.64,-554.98) 628.64,-554.98 ; 628.64,-554.98 v1(651.64,-554.98) ; 628.64,-175.98 634.64,-169.98 634.64,-132.98 605.92,-161.69 605.92,-175.69 v1(605.64,-175.98) 628.64,-175.98 ; 628.64,-175.98 v1(651.64,-175.98) ; 629.02,203.02 v1(651.64,203.02) v1@652,203.02 ; v1(651.64,-554.98) 674.64,-554.98 ; v1(651.64,-175.98) 674.64,-175.98 ; v1@652,203.02 674.98,203.02 ; 674.64,-554.98 668.64,-548.98 668.64,-511.98 697.35,-540.69 697.35,-554.69 v1(697.64,-554.98) 674.64,-554.98 ; 674.64,-175.98 668.64,-169.98 668.64,-132.98 697.35,-161.69 697.35,-175.69 v1(697.64,-175.98) 674.64,-175.98
  Top Layer w50: MOD1.6@1529,375 MOD1.5 1613.58,375.77 1662.29,424.47 1767.88,424.47 C1.1
  Bottom Layer w30: D1.2 1325,470.42 1371.58,517
  Bottom Layer w120: v1(651.64,203.02) 651.64,156.85 645.53,150.74 645.53,81.36 651.64,75.25 v1(651.64,-175.98) 651.64,-222.15 645.53,-228.26 645.53,-297.64 651.64,-303.75 v1(651.64,-554.98) 651.64,-576.71 721.93,-647 875,-647 ; v1@652,203 652,274 895,517 1371.58,517 1455.79,432.79 MOD1.6 MOD1.5
GND: C1.2 C2.2 C3.2 C4.2 C5.2 C6.2 C7.2 C8.2 C9.2 C10.2 C11.2 J1.3 J2.2 J3.3 J4.3 MOD1.3 MOD1.4 MOD1.7 MOD1.8 OC1.4 P1.2 Q2.2 R4.2 U1.2 U1.3 U1.4 U1.5 U2.2 U2.3 U2.4 U2.5 U3.2 U3.3 U3.4 U3.5 | length 3248.7
  Top Layer w8: U1.2@825.28,-362.95 752.28,-362.95 729.28,-339.95 729.28,-310.95 ; U3.2@825.28,16.05 752.28,16.05 729.28,39.05 729.28,68.05 ; U2.2@825.64,395.02 752.64,395.02 729.64,418.02 729.64,447.02 ; U1.3 731.28,-312.95 729.28,-310.95 ; U1.4 v1(729.28,-262.95) 729.28,-310.95 ; U3.3 731.28,66.05 729.28,68.05 ; U3.4 v1(729.28,116.05) 729.28,68.05 ; U2.3 731.64,445.02 729.64,447.02 ; U2.4 v1(729.64,495.02) 729.64,447.02
  Top Layer w20: v1(556.64,-517.98) C4.2 ; v1(556.64,-138.98) C8.2 ; v1(557,240) C6.2
  Top Layer w25: v1(556.36,-262.95) U1.5 v1(729.28,-262.95) ; v1(556.36,116.05) U3.5 v1(729.28,116.05) ; v1(556.72,495.02) U2.5 v1(729.64,495.02) ; C9.2@785.64,-118.98 C9.2 v1(855.02,-115.98) ; C7.2@786,260 C7.2 v1(855.39,263) ; v1(807.79,-733.21) OC1.4@881.1,-733.21 ; U1.2@825.28,-362.95 U1.2 ; U3.2@825.28,16.05 U3.2 ; U2.2@825.64,395.02 U2.2 ; v1(881,-784) 881,-733.31 OC1.4@881.1,-733.21 ; v1(1006,-769) C10.2 ; v1@1081,-816 v1(1080,-815) C11.2 ; v1(1146,-753) C11.2 ; C5.2@785.64,-497.98 844.78,-557.12 853.78,-557.12 v1(855.02,-558.36) ; C5.2@785.64,-497.98 C5.2 v1(855.02,-494.98) v1(855.02,-558.36) ; C5.2@785.64,-497.98 v1(785.64,-558.36) v1(855.02,-558.36) ; OC1.4@881.1,-733.21 OC1.4 986.35,-733.21 1005.02,-714.54 C10.2 ; C10.2 1008.26,-716.81 1040.81,-716.81 1077,-753 C11.2
  Bottom Layer w20: R4.2 v1(1263,-95)
  Bottom Layer w25: R4.2 1216.5,-101.96 Q2.2
  Bottom Layer w50: MOD1.4 1064.08,-374.5 1271.5,-374.5 C3.2
  other v1: 2217,-504.85 2217,-472.85 2217,-440.85 2208.39,396.59 2208.39,428.59 2208.39,460.59
LED1: J4.2 R7.1 | length 1594.7
  Top Layer w10: R7.1 948,-185 1064,-69 1064,230 1115,281 1242,281 1623,662 1698,662 1771.65,735.65 J4.2
LED2: J1.2 R9.1 | length 601.6
  Top Layer w10: J1.2 590.55,722.45 648,665 778,665 948.36,494.64 R9.1
LED3: J3.2 R11.1 | length 852.7
  Top Layer w10: R11.1 948,209 992,253 992,573 1181.1,762.1 J3.2
LED_EN: OC1.5 Q2.1 R4.1 | length 773.4
  Top Layer w20: OC1.5 v1(955,-684) v1@957,-682
  Bottom Layer w20: v1(955,-684) 955,-311 1095,-171 Q2.1 1141.5,-105.96 R4.1
NetC12_1: C12.1 R6.1 | length 70
  Bottom Layer w20: C12.1 R6.1
NetC13_1: C13.1 R8.1 | length 69
  Bottom Layer w20: C13.1 R8.1
NetC14_1: C14.1 R10.1 | length 68
  Bottom Layer w20: C14.1 R10.1
NetOC1_1: OC1.1 R5.2 | length 104.1
  Top Layer w20: R5.2 531.65,-634.89 635.47,-634.89 OC1.1
NetQ1_1: Q1.1 R2.1 R3.1 | length 627.6
  Bottom Layer w20: R2.1 R3.1 1324.54,-180.46 1451,-54 1451,141 1484.76,174.76 Q1.1
NetQ2_3: Q2.3 R3.2 | length 89.3
  Bottom Layer w20: Q2.3 1180,-250 1266.46,-250 R3.2
NetR7_2: R7.2 U1.1 | length 151
  Top Layer w10: U1.1 933.05,-412.95 948,-398 R7.2
NetR9_2: R9.2 U2.1 | length 151
  Top Layer w10: U2.1 933.41,345.02 948.36,359.98 R9.2
NetR11_2: R11.2 U3.1 | length 151
  Top Layer w10: U3.1 933.05,-33.95 948,-19 R11.2
P1_N: C12.2 J5.1 U1.7 | length 570.1
  Top Layer w8: J5.1 269.12,-140.55 332.43,-203.86 342.86,-203.86 487,-348 543.3,-348 v1(553,-357.7) 637.57,-357.7 U1.7
  Bottom Layer w8: C12.2 512.84,-357.7 v1(553,-357.7)
P1_P: J5.2 R6.2 U1.6 | length 545.3
  Top Layer w8: J5.2 320.47,-100.39 292.17,-128.69 292.17,-135.32 340.71,-183.86 351.15,-183.86 495.28,-328 543.2,-328 v1(553,-318.2) 637.57,-318.2 U1.6
  Bottom Layer w8: R6.2 518.75,-318.2 v1(553,-318.2)
P2_N: C13.2 J5.7 U2.7 | length 795.7
  Top Layer w8: J5.7 225.58,103.54 294,103.54 296.55,100.99 437.31,100.99 438.51,99.8 455.08,99.8 498,142.72 498,403 502,407 540.28,407 v1(547,400.28) 637.93,400.28 U2.7 U2.7@608.28,395.02
  Bottom Layer w8: C13.2 520.36,400.28 v1(547,400.28)
P2_P: J5.8 R8.2 U2.6 | length 702
  Top Layer w8: J5.8 333.1,140.55 352.65,120.99 445.6,120.99 446.8,119.8 478,151 478,411.28 506.49,439.77 v1(547,439.77) 637.93,439.77 U2.6 U2.6@607.28,445.02
  Bottom Layer w8: R8.2 513.32,439.77 v1(547,439.77)
P3_N: C14.2 J5.4 U3.7 | length 426
  Top Layer w8: J5.4 333.1,-20.08 352.65,-0.52 473.48,-0.52 495.3,21.3 v1(538,21.3) 637.57,21.3 U3.7 U3.7@607.92,16.05
  Bottom Layer w8: C14.2 506.84,21.3 v1(538,21.3)
P3_P: J5.5 R10.2 U3.6 | length 529.3
  Top Layer w8: J5.5 225.58,16.94 294,16.94 296.55,19.48 457.48,19.48 498.8,60.8 v1(538,60.8) 637.57,60.8 U3.6 U3.6@606.92,66.05
  Bottom Layer w8: R10.2 506.75,60.8 v1(538,60.8)
RJ_GND: J5.6 OC1.3 | length 985.6
  Top Layer w20: v1(558,-732) 558.61,-732.61 634.97,-732.61 OC1.3
  Bottom Layer w20: J5.6 343.76,60.24 385,19 385,-568 549,-732 v1(558,-732)
RJ_LED_EN: J5.3 R5.1 | length 833.1
  Top Layer w20: J5.3 221.09,-61.58 180.42,-61.58 150,-92 150,-174 214.5,-238.5 282.5,-238.5 411,-367 411,-623.28 422.72,-635 R5.1
VIN: C2.1 C3.1 J2.1 MOD1.1 MOD1.2 P1.1 Q1.3 R2.2 | length 967.7
  Top Layer w50: MOD1.1 1619.08,-380.5 1619.08,-448.65 1642.87,-472.44 C2.1
  Top Layer w60: MOD1.2 MOD1.1 1613.58,-223.42 1689,-148
  Bottom Layer w20: R2.2 1487.28,-249 1499,-237.28 1499,-148
  Bottom Layer w30: MOD1.1@1613.58,-388.19 MOD1.1
  Bottom Layer w50: C3.1 1406.5,-374.5 1513.08,-374.5 MOD1.2
  Bottom Layer w70: MOD1.2 MOD1.1
  other v1: 1518.05,-62.91 1580.05,-62.91 1642.05,-62.91 1704.05,-62.91 1642.05,-4.76 1704.05,-4.76 1518.05,53.38 1580.05,53.38 1642.05,53.38 1704.05,53.38
VLED: D1.1 J1.1 J3.1 J4.1 Q1.2 | length 166.1
  Bottom Layer w30: D1.1 1325,134.42 v1(1343.75,115.67)
  other v1: 1187,-7 1239.25,-7 1291.5,-7 1343.75,-7 1396,-7 1187,54.33 1239.25,54.33 1291.5,54.33 1343.75,54.33 1396,54.33 1187,115.67 1239.25,115.67 1291.5,115.67 1396,115.67 1187,177 1239.25,177 1291.5,177 1343.75,177 1396,177
pads on no net: J5.DNC

## Polygon pours and split planes (outlines as drawn)
VIN on Bottom Layer "VIN_L04_P000" (solid, pour order 0): 1634,-227 1626,-219 1508,-219 1473,-184 1473,199 1545,271 2195,271 2302,164 2302,-158 2233,-227
VIN on Top Layer "VIN_L01_P001" (solid, pour order 1): 1552,-236 1475,-159 1475,201 1540,266 1692,269 2196,269 2297,168 2297,-162 2223,-236
VLED on Layer 2 (split plane): 2201.54,924.53 2210.11,923.51 2218.57,921.83 2226.88,919.49 2234.97,916.5 2242.81,912.89 2250.34,908.67 2257.51,903.88 2264.29,898.53 2270.63,892.68 2276.49,886.34 2281.83,879.56 2286.62,872.39 2290.84,864.86 2294.45,857.02 2297.44,848.92 2299.78,840.62 2301.47,832.15 2302.48,823.58 2302.8,815.55 2302.74,814.96 2302.74,-814.96 2302.8,-815.55 2302.48,-823.58 2301.47,-832.15 2299.78,-840.62 2297.44,-848.92 2294.45,-857.02 2290.84,-864.86 2286.62,-872.39 2281.83,-879.56 2276.49,-886.34 2270.63,-892.68 2264.29,-898.53 2257.51,-903.88 2250.34,-908.67 2242.81,-912.89 2234.97,-916.5 2226.88,-919.49 2218.57,-921.83 2210.11,-923.51 2201.54,-924.53 2193.5,-924.84 2192.91,-924.79 169.29,-924.79 168.7,-924.84 160.67,-924.53 152.1,-923.51 143.63,-921.83 135.33,-919.49 127.23,-916.5 119.4,-912.89 111.87,-908.67 104.69,-903.88 97.91,-898.53 91.58,-892.68 85.72,-886.34 80.38,-879.56 75.58,-872.39 71.36,-864.86 67.75,-857.02 64.76,-848.92 62.42,-840.62 60.74,-832.15 59.72,-823.58 59.41,-815.55 59.47,-814.96 59.47,814.96 59.41,815.55 59.72,823.58 60.74,832.15 62.42,840.62 64.76,848.92 67.75,857.02 71.36,864.86 75.58,872.39 80.38,879.56 85.72,886.34 91.58,892.68 97.91,898.53 104.69,903.88 111.87,908.67 119.39,912.89 127.23,916.5 135.33,919.49 143.63,921.83 152.1,923.51 160.67,924.53 168.7,924.84 169.29,924.79 2192.91,924.79 2193.5,924.84
GND on Layer 1 (split plane): 2201.54,924.53 2210.11,923.51 2218.57,921.83 2226.88,919.49 2234.97,916.5 2242.81,912.89 2250.34,908.67 2257.51,903.88 2264.29,898.53 2270.63,892.68 2276.49,886.34 2281.83,879.56 2286.62,872.39 2290.84,864.86 2294.45,857.02 2297.44,848.92 2299.78,840.62 2301.47,832.15 2302.48,823.58 2302.8,815.55 2302.74,814.96 2302.74,-814.96 2302.8,-815.55 2302.48,-823.58 2301.47,-832.15 2299.78,-840.62 2297.44,-848.92 2294.45,-857.02 2290.84,-864.86 2286.62,-872.39 2281.83,-879.56 2276.49,-886.34 2270.63,-892.68 2264.29,-898.53 2257.51,-903.88 2250.34,-908.67 2242.81,-912.89 2234.97,-916.5 2226.88,-919.49 2218.57,-921.83 2210.11,-923.51 2201.54,-924.53 2193.5,-924.84 2192.91,-924.79 169.29,-924.79 168.7,-924.84 160.67,-924.53 152.1,-923.51 143.63,-921.83 135.33,-919.49 127.23,-916.5 119.4,-912.89 111.87,-908.67 104.69,-903.88 97.91,-898.53 91.58,-892.68 85.72,-886.34 80.38,-879.56 75.58,-872.39 71.36,-864.86 67.75,-857.02 64.76,-848.92 62.42,-840.62 60.74,-832.15 59.72,-823.58 59.41,-815.55 59.47,-814.96 59.47,814.96 59.41,815.55 59.72,823.58 60.74,832.15 62.42,840.62 64.76,848.92 67.75,857.02 71.36,864.86 75.58,872.39 80.38,879.56 85.72,886.34 91.58,892.68 97.91,898.53 104.69,903.88 111.87,908.67 119.39,912.89 127.23,916.5 135.33,919.49 143.63,921.83 152.1,923.51 160.67,924.53 168.7,924.84 169.29,924.79 2192.91,924.79 2193.5,924.84

## Other copper
Top Layer:
  rectangle net GND: 785.64,-558.36 855.02,-494.98
  region net GND: 2224.39,389.62 2215.39,380.62 2200.39,380.62 2181.39,399.62 2078.39,399.62 2067.39,410.62 2074.39,417.62 2074.39,443.62 2099.39,443.62 2113.39,457.62 2181.39,457.62 2200.39,476.62 2215.39,476.62 2224.39,467.62 2224.39,462.62
  region net GND: 2233,-511.82 2224,-520.82 2209,-520.82 2190,-501.82 2087,-501.82 2076,-490.82 2083,-483.82 2083,-457.82 2108,-457.82 2122,-443.82 2190,-443.82 2209,-424.82 2224,-424.82 2233,-433.82 2233,-438.82

## Silkscreen, mask and mechanical layers (free items; w line width, h text height)
Top Overlay:
  lines w10: 56.18,-780.96 cw(c169.29,-814.96) 287.4,-814.96 cw(c169.29,-814.96) 203.29,-928.07 ; 56.18,780.96 ccw(c169.29,814.96) 287.4,814.96 ccw(c169.29,814.96) 203.29,928.07 ; 2158.91,-928.07 cw(c2192.91,-814.96) 2306.02,-780.96 ; 2158.91,928.07 ccw(c2192.91,814.96) 2306.02,780.96
  text "V+" at 360.24,601.96 h78.74
  text "GND" at 726.24,601.71 h78.74
  text "V+" at 950.79,601.96 h78.74
  text "GND" at 1316.79,601.71 h78.74
  text "V+" at 1541.34,601.96 h78.74
  text "SIG" at 536.97,601.31 h78.74
  text "SIG" at 1127.52,601.31 h78.74
  text "SIG" at 1676.42,597.26 h78.74
Bottom Overlay:
  text "WLED" at 985.77,138.85 h200
  text "DIFF" at 950.14,-44.05 h200
  text "RX" at 871.85,-222.88 h200
  text "v2" at 853.06,-404.03 h200
  text "GG 2025" at 1079.34,-581.19 h200
Mechanical 1:
  the board outline again, w10
Mechanical 13:
  lines w5: 401.57,-355 502.17,-355 502.17,354.33 401.57,354.33